# EAGLE board motherboard (EAGLE 7.5.0)
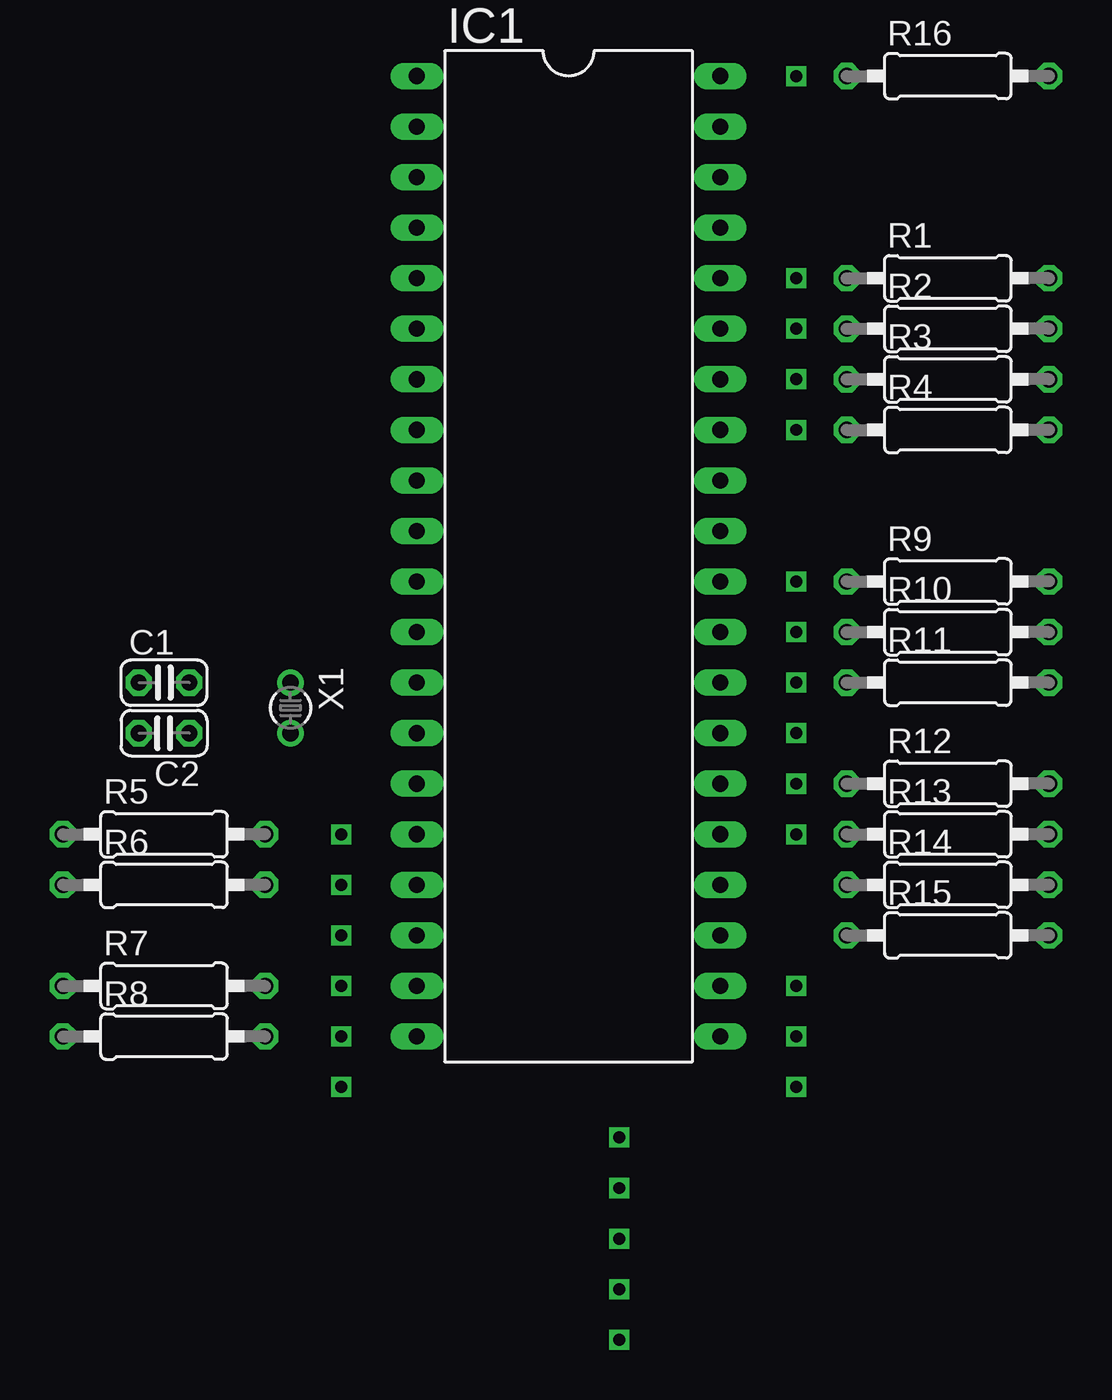
[diagram p0: board, top side]
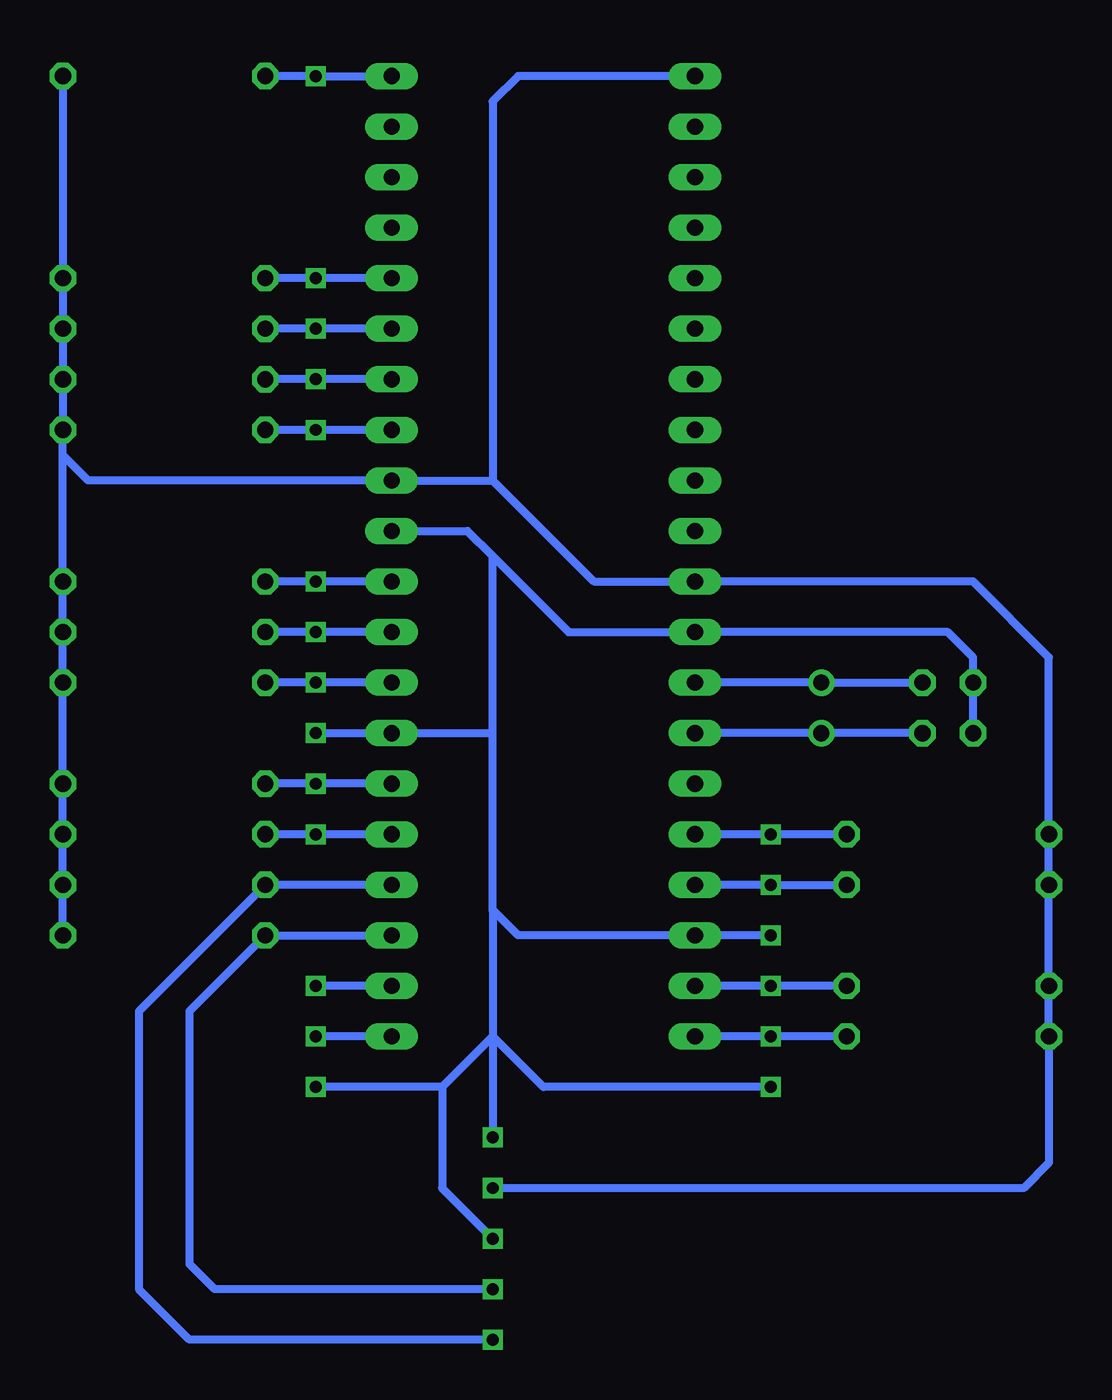
[diagram p1: board, bottom side, seen from below]

No outline drawn. Coordinates in mm, seen from the top.
Copper layers (1*16): Top 0.035mm / dielectric 1.5mm / Bottom 0.035mm
Design rules "default": minimum track width 10mil, minimum drill 0.6mm, track to track 8mil, track to pad 8mil, pad to pad 8mil, via to via 8mil, smd to smd 8mil, copper to edge 40mil, drill to drill 8mil, minimum pad ring 10mil, minimum via ring 8mil, stop-mask expansion 4mil, vias tented up to drill 0mil, thermal gap 10mil

## Footprints (pad centres in the part's own frame; a part is rotated, then mirrored left to right if it is on the bottom)
C025-024X044 = drill 0.813 octagon: 1 -1.27,0; 2 1.27,0
DIL40 = drill 0.813 long: 1 -24.13,-7.62; 2 -21.59,-7.62; 3 -19.05,-7.62; 4 -16.51,-7.62; 5 -13.97,-7.62; 6 -11.43,-7.62; 7 -8.89,-7.62; 8 -6.35,-7.62; 9 -3.81,-7.62; 10 -1.27,-7.62; 11 1.27,-7.62; 12 3.81,-7.62; 13 6.35,-7.62; 14 8.89,-7.62; 15 11.43,-7.62; 16 13.97,-7.62; 17 16.51,-7.62; 18 19.05,-7.62; 19 21.59,-7.62; 20 24.13,-7.62; 21 24.13,7.62; 22 21.59,7.62; 23 19.05,7.62; 24 16.51,7.62; 25 13.97,7.62; 26 11.43,7.62; 27 8.89,7.62; 28 6.35,7.62; 29 3.81,7.62; 30 1.27,7.62; 31 -1.27,7.62; 32 -3.81,7.62; 33 -6.35,7.62; 34 -8.89,7.62; 35 -11.43,7.62; 36 -13.97,7.62; 37 -16.51,7.62; 38 -19.05,7.62; 39 -21.59,7.62; 40 -24.13,7.62
0207/10 = drill 0.813 octagon: 1 -5.08,0; 2 5.08,0
TC26V = drill 0.813: 1 -1.27,0; 2 1.27,0

## Placement (x,y rotation side)
C1  [C025-024X044]  57.15,44.45 0 top
C2  [C025-024X044]  57.15,41.91 180 top
IC1  PIC18F4550  [DIL40]  77.47,50.8 270 top
R1  [0207/10]  96.52,64.77 0 top
R2  [0207/10]  96.52,62.23 0 top
R3  [0207/10]  96.52,59.69 0 top
R4  [0207/10]  96.52,57.15 0 top
R5  [0207/10]  57.15,36.83 0 top
R6  [0207/10]  57.15,34.29 0 top
R7  [0207/10]  57.15,29.21 0 top
R8  [0207/10]  57.15,26.67 0 top
R9  [0207/10]  96.52,49.53 0 top
R10  [0207/10]  96.52,46.99 0 top
R11  [0207/10]  96.52,44.45 0 top
R12  [0207/10]  96.52,39.37 0 top
R13  [0207/10]  96.52,36.83 0 top
R14  [0207/10]  96.52,34.29 0 top
R15  [0207/10]  96.52,31.75 0 top
R16  [0207/10]  96.52,74.93 0 top
X1  [TC26V]  63.5,43.18 270 top

## Library data of the parts
C1 C2 = resistor
IC1 = microchip
R1-R16 = eagle-ltspice
X1 = crystal

## Nets
S$1: C1.2 IC1.13 X1.1
S$2: C2.1 IC1.14 X1.2
S$3: IC1.40 R16.1
S$4: IC1.36 R1.1
S$5: IC1.35 R2.1
S$6: IC1.34 R3.1
S$7: IC1.33 R4.1
S$8: IC1.30 R9.1
S$9: IC1.1 IC1.11 IC1.32 R4.2 R6.1 R8.1 R10.2 R15.2 R16.2
S$10: IC1.29 R10.1
S$11: C2.2 IC1.12 IC1.31
S$12: IC1.16 R5.2
S$13: IC1.17 R6.2
S$17: IC1.19 R7.2
S$18: IC1.20 R8.2
S$19: IC1.21
S$20: IC1.22
S$22: IC1.23 R15.1
S$23: IC1.24 R14.1
S$24: IC1.26 R12.1
S$25: IC1.25 R13.1
S$28: IC1.28 R11.1

## Tracks (layer width: path | path; a pad name or v marks a point on that pad's centre or on a via)
S$1
  Bottom 0.406: C1.2 X1.1 IC1.13
S$2
  Bottom 0.406: C2.1 X1.2 IC1.14
S$3  (via drill 0.6)
  Bottom 0.406: IC1.40 v88.9,74.93 R16.1
S$4  (via drill 0.6)
  Bottom 0.406: IC1.36 v88.9,64.77 R1.1
S$5  (via drill 0.6)
  Bottom 0.406: IC1.35 v88.9,62.23 R2.1
S$6  (via drill 0.6)
  Bottom 0.406: IC1.34 v88.9,59.69 R3.1
S$7  (via drill 0.6)
  Bottom 0.406: IC1.33 v88.9,57.15 R4.1
S$8  (via drill 0.6)
  Bottom 0.406: IC1.30 v88.9,49.53 R9.1
S$9  (via drill 0.6)
  Bottom 0.406: IC1.1 78.74,74.93 80.01,73.66 80.01,54.61 | 80.01,54.61 IC1.32 100.33,54.61 101.6,55.88 R4.2 | 80.01,54.61 74.93,49.53 IC1.11 55.88,49.53 52.07,45.72 R6.1 R8.1 52.07,20.32 53.34,19.05 v80.01,19.05 | R16.2 R4.2 | R4.2 R10.2 R15.2
S$10  (via drill 0.6)
  Bottom 0.406: IC1.29 v88.9,46.99 R10.1
S$11  (via drill 0.6)
  Bottom 0.406: v66.04,31.75 78.74,31.75 80.01,33.02 | C2.2 55.88,45.72 57.15,46.99 IC1.12 76.2,46.99 80.01,50.8 | IC1.31 81.28,52.07 80.01,50.8 | 80.01,33.02 80.01,41.91 | 80.01,41.91 80.01,50.8 | 80.01,33.02 80.01,26.67 | 80.01,26.67 82.55,24.13 | 82.55,24.13 v88.9,24.13 | v88.9,41.91 80.01,41.91 | 80.01,26.67 v80.01,21.59 | 82.55,24.13 82.55,19.05 v80.01,16.51 | v66.04,24.13 77.47,24.13 80.01,26.67
S$12  (via drill 0.6)
  Bottom 0.406: R5.2 v66.04,36.83 IC1.16
S$13  (via drill 0.6)
  Bottom 0.406: R6.2 v66.04,34.29 IC1.17
S$15  (via drill 0.6)
  other vias: 66.04,29.21
S$16  (via drill 0.6)
  other vias: 66.04,26.67
S$17
  Bottom 0.406: R7.2 IC1.19
S$18
  Bottom 0.406: R8.2 IC1.20
S$19  (via drill 0.6)
  Bottom 0.406: IC1.21 v88.9,26.67
S$20  (via drill 0.6)
  Bottom 0.406: IC1.22 v88.9,29.21
S$22  (via drill 0.6)
  Bottom 0.406: v80.01,13.97 93.98,13.97 95.25,15.24 95.25,27.94 R15.1 IC1.23
S$23  (via drill 0.6)
  Bottom 0.406: v80.01,11.43 95.25,11.43 97.79,13.97 97.79,27.94 R14.1 IC1.24
S$24  (via drill 0.6)
  Bottom 0.406: IC1.26 v88.9,39.37 R12.1
S$25  (via drill 0.6)
  Bottom 0.406: IC1.25 v88.9,36.83 R13.1
S$27  (via drill 0.6)
  other vias: 88.9,44.45
S$28
  Bottom 0.406: IC1.28 R11.1